# Altium PCB modFOC_ESC.PcbDoc
Units mil, origin at the board's own origin, x right, y up, seen from the top; angles counter-clockwise.
Board outline 6000 x 4000 mil, 2 copper layers (Top Layer, Bottom Layer); 101 components, 80 nets, 411 pads, 0 vias.
Unrouted connection lines stored in the file: 297.
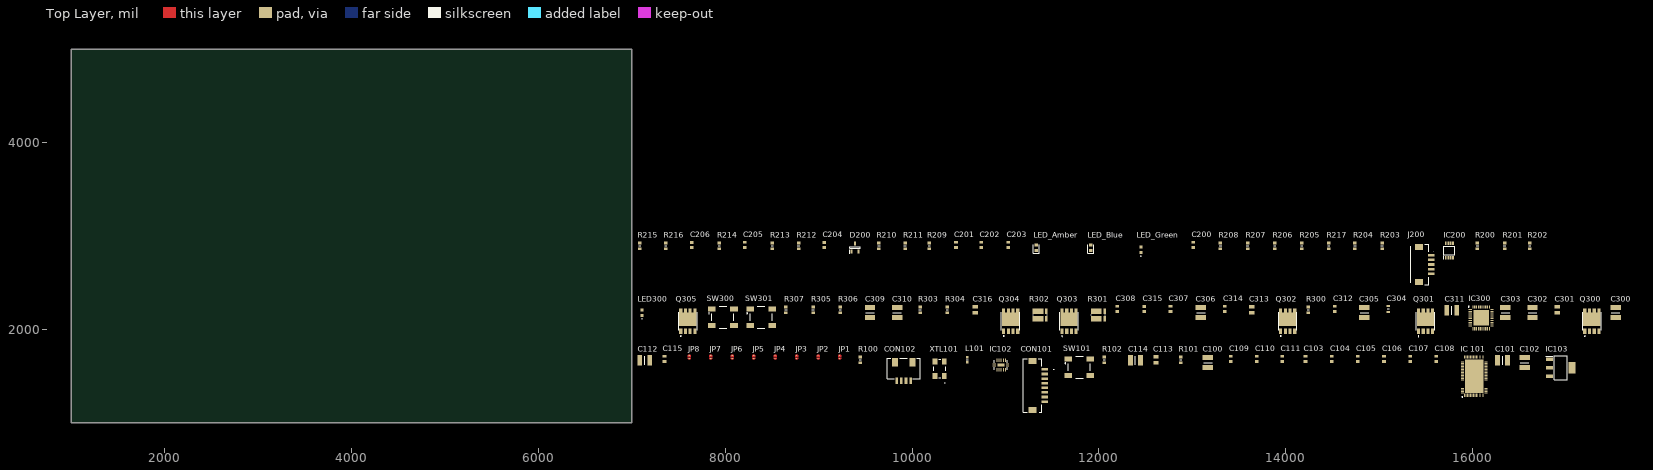
[diagram p0: Top Layer view]
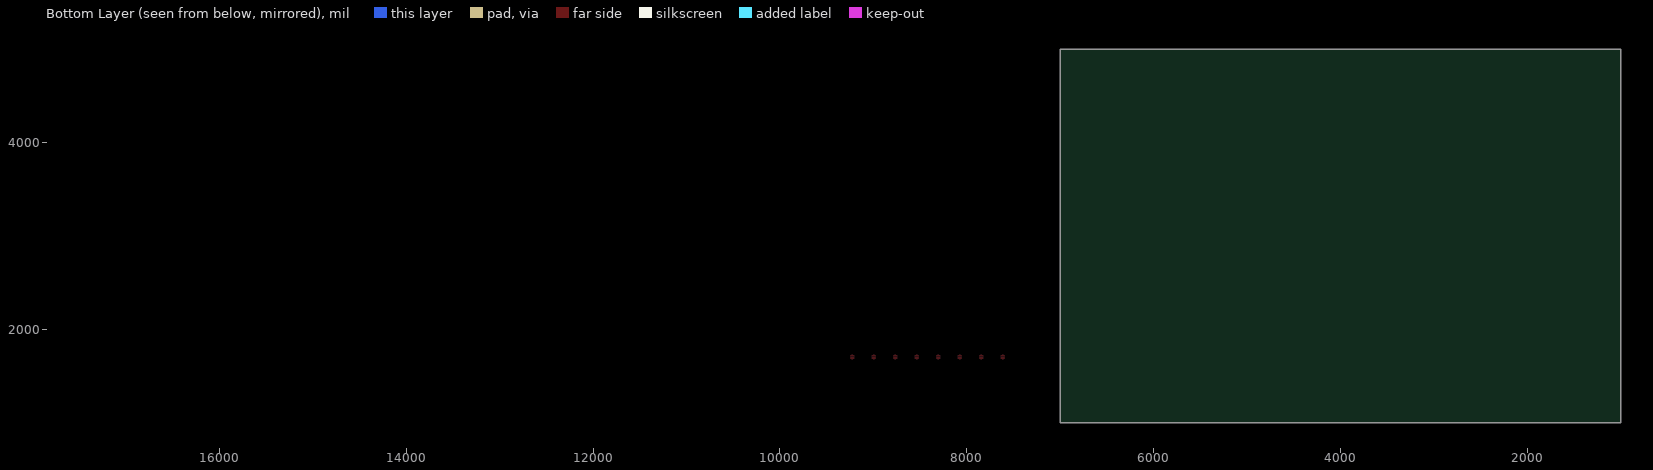
[diagram p1: Bottom Layer view, seen from below]

## Layer stack, top to bottom
Top Solder: solder mask 0.4, Solder Resist, Dk 3.5
Top Layer: signal copper 1.4
Dielectric 1: dielectric 12.6, FR-4, Dk 4.8
Bottom Layer: signal copper 1.4
Bottom Solder: solder mask 0.4, Solder Resist, Dk 3.5

## Board outline
1000,1000 7000,1000 7000,5000 1000,5000

## Design rules (kind name [scope] priority, off if disabled: settings)
Clearance [All] p1: gap=10 ignorepadtopadclearanceinfootprint=FALSE except(0: Arc-Hole Track-Hole SMDPad-Hole THPad-Hole Via-Hole Fill-Hole Poly-Hole Region-Hole Text-Hole)
PolygonConnect [All] p1: connectstyle=Relief reliefconductorwidth=10 reliefentries=4 polygonreliefangle="90 Angle" airgapwidth=10
RoomDefinition modFOC-Sensing [InComponentClass('modFOC-Sensing')] p1: confinementstyle=ConfineIn formatcopy=TRUE lockcomponents=FALSE outline 7045,2430 16825,2430 16825,3060 7045,3060
RoomDefinition modFOC-Powerstage [InComponentClass('modFOC-Powerstage')] p2: confinementstyle=ConfineIn formatcopy=TRUE lockcomponents=FALSE outline 7045,1890 17715,1890 17715,2375 7045,2375
RoomDefinition modFOC-Motion_Controller [InComponentClass('modFOC-Motion_Controller')] p3: confinementstyle=ConfineIn formatcopy=TRUE lockcomponents=FALSE outline 7045,1060 17115,1060 17115,1840 7045,1840
RoutingVias [All] p1: holewidth=28 width=50 viastyle="Through Hole" minholewidth=28 minwidth=50 maxholewidth=28 maxwidth=50
SolderMaskExpansion [All] p1: expansion=4 istentingtop=FALSE
Width [All] p1: maxlimit=10 minlimit=10 preferedwidth=10
30 further rules are at their usual default settings.

## Classes and differential pairs
component class modFOC-Powerstage: C300 C301 C302 C303 C304 C305 C306 C307 C308 C309 C310 C311 C312 C313 C314 C315 C316 IC300 IC? LED300 Q300 Q301 Q302 Q303 Q304 Q305 R300 R301 R302 R303 R304 R305 R306 R307 RADJ1 RT1 SW300 SW301
component class modFOC-Sensing: C200 C201 C202 C203 C204 C205 C206 D200 IC200 J200 LED_Amber LED_Blue LED_Green R200 R201 R202 R203 R204 R205 R206 R207 R208 R209 R210 R211 R212 R213 R214 R215 R216 R217
component class modFOC-Motion_Controller: C100 C101 C102 C103 C104 C105 C106 C107 C108 C109 C110 C111 C112 C113 C114 C115 CON101 CON102 IC102 IC103 "IC 101" JP1 JP2 JP3 JP4 JP5 JP6 JP7 JP8 L101 R100 R101 R102 SW101 XTL101

## Components (designator, comment, footprint, x,y, rotation, side; value= is the part's Value field where it differs from the comment)
C100 "10uF" CAPC3225X280N 13165,1645 r90 top
C101 "10uF" CAPC3225X280N 16320,1670 r0 top
C102 "10uF" CAPC3225X280N 16555,1645 r90 top
C103 "100nF/63V" CAPC1608X97N 14210,1685 r90 top
C104 "100nF/63V" CAPC1608X97N 14490,1685 r90 top
C105 "100nF/63V" CAPC1608X97N 14770,1685 r90 top
C106 "100nF/63V" CAPC1608X97N 15050,1685 r90 top
C107 "100nF/63V" CAPC1608X97N 15330,1685 r90 top
C108 "100nF/63V" CAPC1608X97N 15610,1685 r90 top
C109 "100nF/63V" CAPC1608X97N 13410,1685 r90 top
C110 "100nF/63V" CAPC1608X97N 13690,1685 r90 top
C111 "100nF/63V" CAPC1608X97N 13960,1685 r90 top
C112 "10uF" CAPC3225X280N 7140,1670 r0 top
C113 "470nF/100V" CAPC2012X140N 12610,1675 r90 top
C114 "10uF" CAPC3225X280N 12390,1670 r0 top
C115 "100nF/63V" CAPC1608X97N 7350,1685 r90 top
C200 "100nF" CAPC1608X97N 13010,2905 r90 top
C201 "1n/25V" CAPC1608X97N 10470,2905 r90 top
C202 "1n/25V" CAPC1608X97N 10740,2905 r90 top
C203 "1n/25V" CAPC1608X97N 11030,2905 r90 top
C204 "100pF/63V" CAPC1608X87N 9060,2905 r90 top
C205 "100nF/63V" CAPC1608X97N 8210,2905 r90 top
C206 "100pF/63V" CAPC1608X87N 7640,2905 r90 top
C300 "10uF" CAPC3225X280N 17530,2180 r90 top
C301 "470nF/100V" CAPC2012X140N 16905,2210 r90 top
C302 "10uF/63V" CAPC3225X280N 16640,2180 r90 top
C303 "10uF/63V" CAPC3225X280N 16350,2180 r90 top
C304 "47nF/50V" CAPC1608X90N 15095,2220 r90 top
C305 "10uF" CAPC3225X280N 14840,2180 r90 top
C306 "10uF/63V" CAPC3225X280N 13090,2180 r90 top
C307 "100nF/63V" CAPC1608X97N 12765,2220 r90 top
C308 "100nF/63V" CAPC1608X97N 12195,2220 r90 top
C309 "10uF" CAPC3225X280N 9550,2180 r90 top
C310 "10uF" CAPC3225X280N 9840,2180 r90 top
C311 "10uF/63V" CAPC3225X280N 15775,2205 r0 top
C312 "100nF/63V" CAPC1608X97N 14525,2220 r90 top
C313 "470nF/100V" CAPC2012X140N 13635,2210 r90 top
C314 "100nF/63V" CAPC1608X97N 13345,2220 r90 top
C315 "100pF/63V" CAPC1608X87N 12485,2220 r90 top
C316 "470nF/100V" CAPC2012X140N 10675,2210 r90 top
CON101 "DF13A-8P-1.25H_21_" DF13A8P125H21 11290,1400 r90 top
CON102 "DF13A-4P-1.25H_51_" DF13A4P125H51 9910,1570 r0 top
D200 "BAT54S" SOT95P240X110-3N 9390,2875 r90 top
IC102 "74LVC138ABQ,115" 74HCT595BQ115 10950,1620 r0 top
IC103 "AP2114H-3.3TRG1" SOT230P700X180-4N 16940,1590 r0 top
IC200 "74LVC3G17DP,125" SOP65P400X110-8N 15750,2845 r90 top
IC300 "DRV8323HRTAR" QFN50P600X600X80-41N-D 16090,2125 r0 top
"IC 101" "TMC4671-LA IC" QFN40P1050X650X90-77N 16015,1500 r90 top
J200 "DF13A-5P-1.25H_21_" DF13A5P125H21 15445,2695 r90 top
JP1 "SolderJumper" SolderJmp_0.8mm 9225,1705 r90 top
JP2 "SolderJumper" SolderJmp_0.8mm 8995,1705 r90 top
JP3 "SolderJumper" SolderJmp_0.8mm 8765,1705 r90 top
JP4 "SolderJumper" SolderJmp_0.8mm 8535,1705 r90 top
JP5 "SolderJumper" SolderJmp_0.8mm 8305,1705 r90 top
JP6 "SolderJumper" SolderJmp_0.8mm 8075,1705 r90 top
JP7 "SolderJumper" SolderJmp_0.8mm 7845,1705 r90 top
JP8 "SolderJumper" SolderJmp_0.8mm 7615,1705 r90 top
L101 "30Ohm @100MHz" BLM18KG101TH1D 10590,1675 r90 top
LED300 "RED 2,2V/2mA" LSL29KG1J21Z 7110,2180 r90 top
LED_Amber "AMBER 2V/20mA" LEDC1608X55N 11330,2875 r90 top
LED_Blue "BLUE 2,85V/5mA" LEDC1608X40N 11910,2875 r90 top
LED_Green "GREEN 2,4V/20mA" LGQ396PS35 12450,2855 r90 top
Q300 "TPH2R506PL,L1Q" TPHR9003NLL1Q 17275,2070 r0 top
Q301 "TPH2R506PL,L1Q" TPHR9003NLL1Q 15495,2070 r0 top
Q302 "TPH2R506PL,L1Q" TPHR9003NLL1Q 14020,2070 r0 top
Q303 "TPH2R506PL,L1Q" TPHR9003NLL1Q 11680,2070 r0 top
Q304 "TPH2R506PL,L1Q" TPHR9003NLL1Q 11055,2070 r0 top
Q305 "TPH2R506PL,L1Q" TPHR9003NLL1Q 7600,2070 r0 top
R100 "10k" RESC1608X55N 9445,1675 r90 top
R101 "10k" RESC1608X55N 12875,1675 r90 top
R102 "100R" RESC1608X55N 12055,1675 r90 top
R200 "4k7" RESC1608X55N 16050,2895 r90 top
R201 "4k7" RESC1608X55N 16340,2895 r90 top
R202 "4k7" RESC1608X55N 16610,2895 r90 top
R203 "150R" RESC1608X55N 15030,2895 r90 top
R204 "100R" RESC1608X55N 14740,2895 r90 top
R205 "1k5" RESC1608X55N 14170,2895 r90 top
R206 "4k7" RESC1608X55N 13880,2895 r90 top
R207 "4k7" RESC1608X55N 13590,2895 r90 top
R208 "4k7" RESC1608X55N 13300,2895 r90 top
R209 "100R" RESC1608X55N 10185,2895 r90 top
R210 "10k" RESC1608X55N 9645,2895 r90 top
R211 "10k" RESC1608X55N 9925,2895 r90 top
R212 "100k" RESC1608X55N 8785,2895 r90 top
R213 "1k5" RESC1608X55N 8505,2895 r90 top
R214 "100R" RESC1608X55N 7935,2895 r90 top
R215 "10k" RESC1608X55N 7085,2895 r90 top
R216 "10k" RESC1608X55N 7365,2895 r90 top
R217 "1k5" RESC1608X55N 14460,2895 r90 top
R300 "1M" RESC1608X55N 14240,2210 r90 top
R301 "5mR/3W" WSK12161L000FEA 11995,2155 r0 top
R302 "5mR/3W" WSK12161L000FEA 11370,2155 r0 top
R303 "10k" RESC1608X55N 10085,2210 r90 top
R304 "10k" RESC1608X55N 10375,2210 r90 top
R305 "100R" RESC1608X55N 8940,2210 r90 top
R306 "100R" RESC1608X55N 9230,2210 r90 top
R307 "470R" RESC1608X55N 8650,2210 r90 top
SW101 "LL3301AF065QJ" LL3301FF065QJ 11790,1595 r0 top
SW300 "LL3301AF065QJ" LL3301FF065QJ 7975,2130 r0 top
SW301 "LL3301AF065QJ" LL3301FF065QJ 8385,2130 r0 top
XTL101 "25MHz" FOX924B25 10295,1580 r90 top

## Footprints (in the part's own frame and the unit in brackets; to place one, negate y for a bottom-side part, rotate by r counter-clockwise, add the part's x,y. Pads: shape width x height; smd on the part's side, far side on the other; paste and mask are expansions set on the pad)
74HCT595BQ115 [mm]
  rect 0.9x0.24 smd: 1(-1.8,-0.25) 8(1.8,-0.25) 9(1.8,0.25) 16(-1.8,0.25)
  rect 0.24x0.9 smd: 2(-1.25,-1.3) 3(-0.75,-1.3) 4(-0.25,-1.3) 5(0.25,-1.3) 6(0.75,-1.3) 7(1.25,-1.3) 10(1.25,1.3) 11(0.75,1.3) 12(0.25,1.3) 13(-0.25,1.3) 14(-0.75,1.3) 15(-1.25,1.3)
  rect 1.9x0.9 smd: 17(0,0)
  silkscreen extent -1.75,-1.25 1.75,1.25, body extent -1.8,-1.3 1.8,1.3, height 1
BLM18KG101TH1D [mm]
  rect 0.65x0.7 smd: 1(-0.675,0) 2(0.675,0)
  silkscreen extent 0,-0.3 0,0.3, body extent -0.93,-0.4 0.93,0.4, height 0.85
CAPC1608X87N [mm]
  rect 0.8x0.94 smd: 1(-0.67,0) 2(0.67,0)
  body extent -0.8,-0.4 0.8,0.4, height 0.87
CAPC1608X90N [mm]
  rect 0.54x0.94 smd: 1(-0.8,0) 2(0.8,0)
  silkscreen extent 0,-0.3 0,0.3, body extent -0.8,-0.4 0.8,0.4, height 0.9
CAPC1608X97N [mm]
  rect 0.78x0.98 smd: 1(-0.7,0) 2(0.7,0)
  body extent -0.8,-0.4 0.8,0.4, height 0.97
CAPC2012X140N [mm]
  rect 1.02x1.47 smd: 1(-0.81,0) 2(0.81,0)
  body extent -1,-0.63 1,0.63, height 1.4
CAPC3225X280N [mm]
  rect 1.3x2.82 smd: 1(-1.36,0) 2(1.36,0)
  silkscreen extent 0,-1.15 0,1.15, body extent -1.6,-1.25 1.6,1.25, height 2.8
DF13A4P125H51 [mm]
  rect 0.7x1.8 smd: 1(-1.875,-3.075) 2(-0.625,-3.075) 3(0.625,-3.075) 4(1.875,-3.075)
  rect 1.6x2.2 smd: 5(-2.4,2.005) 6(2.4,2.005)
  silkscreen extent -4.5,-2.42 4.5,3.08, body extent -4.5,-3.91 4.5,3.08, height 3.1
DF13A5P125H21 [mm]
  rect 0.7x1.8 smd: 1(2.5,-2.8) 2(1.25,-2.8) 3(0,-2.8) 4(-1.25,-2.8) 5(-2.5,-2.8)
  rect 1.6x2.2 smd: MP1(-4.75,0.5) MP2(4.75,0.5)
  silkscreen extent -5.45,-3.55 5.45,2.8, body extent -5.45,-3.63 5.45,2.8, height 3.85
DF13A8P125H21 [mm]
  rect 0.7x1.8 smd: 1(4.375,-3.3) 2(3.125,-3.3) 3(1.875,-3.3) 4(0.625,-3.3) 5(-0.625,-3.3) 6(-1.875,-3.3) 7(-3.125,-3.3) 8(-4.375,-3.3)
  rect 1.6x2.2 smd: MP1(-6.625,0) MP2(6.625,0)
  silkscreen extent -7.32,-5.8 7.32,2.5, body extent -7.32,-4.13 7.32,2.5, height 3.7
FOX924B25 [mm]
  rect 1.6x1.3 smd: 1(-2,-1.25) 2(2,-1.25) 3(2,1.25) 4(-2,1.25)
  silkscreen extent -3.9,-1.6 2.5,1.6, body extent -2.67,-1.77 2.67,1.77, height 1.6
LEDC1608X40N [mm]
  rect 0.9x0.95 smd: 1(-0.75,0) 2(0.75,0)
  silkscreen extent -1.55,-0.82 0.75,0.82, body extent -0.8,-0.4 0.8,0.4, height 0.5
LEDC1608X55N [mm]
  rect 0.9x0.95 smd: 1(-0.75,0) 2(0.75,0)
  silkscreen extent -1.55,-0.82 0.75,0.82, body extent -0.8,-0.4 0.8,0.4, height 0.5
LGQ396PS35 [mm]
  rect 0.8x0.8 smd: 1(-0.75,0) 2(0.75,0)
  silkscreen extent -1.85,0 -1.75,0.1, body extent -0.8,-0.4 0.8,0.4, height 0.5
LL3301FF065QJ [mm]
  rect 2.1x1.4 smd: 1(-3,2.25) 2(3,2.25) 3(-3,-2.25) 4(3,-2.25)
  silkscreen extent -3.9,-3 3,3, body extent -3.91,-3 3.91,3, height 7.4
LSL29KG1J21Z [mm]
  rect 0.8x0.8 smd: 1(-0.75,0) 2(0.75,0)
  silkscreen extent -1.7,-0.05 -1.6,0.05, body extent -0.65,-0.4 0.65,0.4, height 0.77
QFN40P1050X650X90-77N [mm]
  rect 0.85x0.2 smd: 1(-5.2,2.6) 2(-5.2,2.2) 3(-5.2,1.8) 4(-5.2,1.4) 5(-5.2,1) 6(-5.2,0.6) 7(-5.2,0.2) 8(-5.2,-0.2) 9(-5.2,-0.6) 10(-5.2,-1) 11(-5.2,-1.4) 12(-5.2,-1.8) 13(-5.2,-2.2) 14(-5.2,-2.6) 39(5.2,-2.6) 40(5.2,-2.2) 41(5.2,-1.8) 42(5.2,-1.4) 43(5.2,-1) 44(5.2,-0.6) 45(5.2,-0.2) 46(5.2,0.2) 47(5.2,0.6) 48(5.2,1) 49(5.2,1.4) 50(5.2,1.8) 51(5.2,2.2) 52(5.2,2.6)
  rect 0.2x0.85 smd: 15(-4.6,-3.2) 16(-4.2,-3.2) 17(-3.8,-3.2) 18(-3.4,-3.2) 19(-3,-3.2) 20(-2.6,-3.2) 21(-2.2,-3.2) 22(-1.8,-3.2) 23(-1.4,-3.2) 24(-1,-3.2) 25(-0.6,-3.2) 26(-0.2,-3.2) 27(0.2,-3.2) 28(0.6,-3.2) 29(1,-3.2) 30(1.4,-3.2) 31(1.8,-3.2) 32(2.2,-3.2) 33(2.6,-3.2) 34(3,-3.2) 35(3.4,-3.2) 36(3.8,-3.2) 37(4.2,-3.2) 38(4.6,-3.2) 53(4.6,3.2) 54(4.2,3.2) 55(3.8,3.2) 56(3.4,3.2) 57(3,3.2) 58(2.6,3.2) 59(2.2,3.2) 60(1.8,3.2) 61(1.4,3.2) 62(1,3.2) 63(0.6,3.2) 64(0.2,3.2) 65(-0.2,3.2) 66(-0.6,3.2) 67(-1,3.2) 68(-1.4,3.2) 69(-1.8,3.2) 70(-2.2,3.2) 71(-2.6,3.2) 72(-3,3.2) 73(-3.4,3.2) 74(-3.8,3.2) 75(-4.2,3.2) 76(-4.6,3.2)
  rect 9.1x5.1 smd: 77(0,0)
  silkscreen extent -5.72,3.1 -5.53,3.3, body extent -5.3,-3.3 5.3,3.3, height 0.9
QFN50P600X600X80-41N-D [mm]
  rect 0.9x0.3 smd: 1(-2.95,2.25) 2(-2.95,1.75) 3(-2.95,1.25) 4(-2.95,0.75) 5(-2.95,0.25) 6(-2.95,-0.25) 7(-2.95,-0.75) 8(-2.95,-1.25) 9(-2.95,-1.75) 10(-2.95,-2.25) 21(2.95,-2.25) 22(2.95,-1.75) 23(2.95,-1.25) 24(2.95,-0.75) 25(2.95,-0.25) 26(2.95,0.25) 27(2.95,0.75) 28(2.95,1.25) 29(2.95,1.75) 30(2.95,2.25)
  rect 0.3x0.9 smd: 11(-2.25,-2.95) 12(-1.75,-2.95) 13(-1.25,-2.95) 14(-0.75,-2.95) 15(-0.25,-2.95) 16(0.25,-2.95) 17(0.75,-2.95) 18(1.25,-2.95) 19(1.75,-2.95) 20(2.25,-2.95) 31(2.25,2.95) 32(1.75,2.95) 33(1.25,2.95) 34(0.75,2.95) 35(0.25,2.95) 36(-0.25,2.95) 37(-0.75,2.95) 38(-1.25,2.95) 39(-1.75,2.95) 40(-2.25,2.95)
  rect 4.25x4.25 smd: 41(0,0)
  silkscreen extent -3.52,2.88 -3.27,3.12, body extent -3.05,-3.05 3.05,3.05, height 0.8
RESC1608X55N [mm]
  rect 0.8x0.95 smd: 1(-0.8,0) 2(0.8,0)
  silkscreen extent 0,-0.3 0,0.3, body extent -0.8,-0.4 0.8,0.4, height 0.55
SolderJmp_0.8mm [mm]
  round 0.3 smd paste+0 mask+0: 1(-0.4,0) 2(0.4,0)
  Top Layer region: -0.15,-0.4 -0.324,-0.36 -0.463,-0.249 -0.54,-0.089 -0.54,0.089 -0.463,0.249 -0.324,0.36 -0.15,0.4 -0.15,0.4
  Top Layer region: 0.15,0.4 0.324,0.36 0.463,0.249 0.54,0.089 0.54,-0.089 0.463,-0.249 0.324,-0.36 0.15,-0.4 0.15,-0.4
  Top Layer lines w0.1: -0.15,0.4 ccw(c-0.15,0) -0.15,-0.4 -0.15,0.4 ; 0.15,0.4 cw(c0.15,0) 0.15,-0.4 0.15,0.4
SOP65P400X110-8N [mm]
  rect 0.95x0.45 smd: 1(-1.975,0.975) 2(-1.975,0.325) 3(-1.975,-0.325) 4(-1.975,-0.975) 5(1.975,-0.975) 6(1.975,-0.325) 7(1.975,0.325) 8(1.975,0.975)
  silkscreen extent -2.45,-1.5 1.15,1.55, body extent -2,-1.5 2,1.5, height 1.1
SOT95P240X110-3N [mm]
  rect 1.1x0.6 smd: 1(-1.1,0.95) 2(-1.1,-0.95) 3(1.1,0)
  silkscreen extent -1.65,-1.45 0.2,1.5, body extent -1.2,-1.45 1.2,1.45, height 1.1
SOT230P700X180-4N [mm]
  rect 1.9x0.9 smd: 1(-3.05,2.3) 2(-3.05,0) 3(-3.05,-2.3)
  rect 1.9x3.2 smd: 4(3.05,0)
  silkscreen extent -4,-3.25 1.75,3.25, body extent -3.5,-3.25 3.5,3.25, height 1.8
TPHR9003NLL1Q [mm]
  rect 0.85x1.45 smd: 1(-1.925,-2.309) 2(-0.635,-2.309) 3(0.635,-2.309) 4(1.925,-2.309)
  rect 0.85x1.05 smd: 5(1.925,3.391) 6(0.635,3.391) 7(-0.635,3.391) 8(-1.925,3.391)
  rect 4.7x3.75 smd: 9(0,0.981)
  silkscreen extent -2.5,-3.7 2.5,2.94, body extent -2.5,-2.95 2.5,3.83, height 1.1
WSK12161L000FEA [mm]
  rect 2.95x1.495 smd: 1(-0.6,-1.053) 4(-0.6,1.053)
  rect 0.7x1.495 smd: 2(1.725,-1.053) 3(1.725,1.053)
  silkscreen extent -1.91,-0.1 1.9,0.1, body extent -2.06,-1.75 1.95,1.75, height 1.51

## Part data
C100 C101 C102 C112 C114 C300 C302 C303 C305 C306 C309 C310 C311: library part CL32B106KMVNNWE, "Capacitor", Manufacturer_Name="Samsung Electro-Mechanics", Mouser Part Number=187-CL32B106KMVNNWE, Arrow Part Number=CL32B106KMVNNWE, Arrow Price/Stock=https://www.arrow.com/en/products/cl32b106kmvnnwe/samsung-electro-mechanics, Datasheet Link=https://www.arrow.com/en/products/cl32b106kmvnnwe/samsung-electro-mechanics, Height=2.8mm, Manufacturer_Part_Number=CL32B106KMVNNWE, Mouser Price/Stock=https://www.mouser.co.uk/ProductDetail/Samsung-Electro-Mechanics/CL32B106KMVNNWE?qs=xZ%2FP%252Ba9zWqaEMBbSgKy8gQ%3D%3D
C103 C104 C105 C106 C107 C108 C109 C110 C111 C115 C205 C307 C308 C312 C314: library part C0805C104MMREC7210, "Capacitor", Manufacturer_Name=Vishay, Manufacturer_Part_Number=VJ0603Y104JXJAC, Mouser Part Number=77-VJ0603Y104JXJAC, Datasheet Link=http://www.vishay.com/docs/45226/vj31xrohsautomlcc.pdf, Height=1mm, Mouser Price/Stock=https://www.mouser.com/Search/Refine.aspx?Keyword=77-VJ0603Y104JXJAC
C113 C301 C313 C316: library part 08051C474KAT2A, "Capacitor", Manufacturer_Name=AVX, Mouser Part Number=581-08051C474KAT2A, Datasheet Link=http://datasheets.avx.com/X7RDielectric.pdf, Height=1.4mm, Manufacturer_Part_Number=08051C474KAT2A, Mouser Price/Stock=https://www.mouser.co.uk/ProductDetail/AVX/08051C474KAT2A?qs=%2FjdEcI0p95Mz%2FN5KbrGN6Q%3D%3D
C200: library part VJ0603Y104JXJAC, "Capacitor", Manufacturer_Name=Vishay, Mouser Part Number=77-VJ0603Y104JXJAC, Datasheet Link=http://www.vishay.com/docs/45226/vj31xrohsautomlcc.pdf, Height=0.97mm, Manufacturer_Part_Number=VJ0603Y104JXJAC, Mouser Price/Stock=https://www.mouser.com/Search/Refine.aspx?Keyword=77-VJ0603Y104JXJAC
C201 C202 C203: library part GRM033R71E102KA01D, "Capacitor", Manufacturer_Name="Murata Electronics", Mouser Part Number=81-GRM033R71E102KA1D, Arrow Part Number=GRM033R71E102KA01D, Arrow Price/Stock=https://www.arrow.com/en/products/grm033r71e102ka01d/murata-manufacturing, Datasheet Link=https://psearch.en.murata.com/capacitor/product/GRM033R71E102KA01%23.html, Height=0.33mm, Manufacturer_Part_Number=GRM033R71E102KA01D, Mouser Price/Stock=https://www.mouser.co.uk/ProductDetail/Murata-Electronics/GRM033R71E102KA01D/?qs=%252BwCMEOx2S5vqymn%2Fc34U1A%3D%3D
C204 C206 C315: library part C0603C101K1HACTU, "Capacitor", Manufacturer_Name=Kemet, Mouser Part Number=80-C0603C101K1HACTU, Datasheet Link=https://www.mouser.com/datasheet/2/212/KEM_C1007_X8R_ULTRA_150C_SMD-1102703.pdf, Height=0.87mm, Manufacturer_Part_Number=C0603C101K1HACTU, Mouser Price/Stock=https://www.mouser.co.uk/ProductDetail/KEMET/C0603C101K1HACTU?qs=W0yvOO0ixfE5G01qpfeqIQ%3D%3D
C304: library part CGA3E2X7R1H473K080AA, "Capacitor", Manufacturer_Name=TDK, Mouser Part Number=810-CGA3E2X7R1H473K, Arrow Part Number=CGA3E2X7R1H473K080AA, Arrow Price/Stock=https://www.arrow.com/en/products/cga3e2x7r1h473k080aa/tdk, Datasheet Link=http://docs-emea.rs-online.com/webdocs/14e9/0900766b814e9125.pdf, Height=0.9mm, Manufacturer_Part_Number=CGA3E2X7R1H473K080AA, Mouser Price/Stock=https://www.mouser.co.uk/ProductDetail/TDK/CGA3E2X7R1H473K080AA?qs=NRhsANhppD%252BXNlr9LoLgTw%3D%3D
CON101: "Connector", Manufacturer_Name=Hirose, Manufacturer_Part_Number=DF13A-8P-1.25H(21), Mouser Part Number=798-DF13A8P125H21, Datasheet Link=http://uk.rs-online.com/web/p/products/7793617P, Height=3.6mm, Mouser Price/Stock=https://www.mouser.co.uk/ProductDetail/Hirose-Connector/DF13A-8P-125H21?qs=XQjbzJWzFPViW0MGk5%2FVbA%3D%3D
CON102: "Connector", Manufacturer_Name=Hirose, Manufacturer_Part_Number=DF13A-4P-1.25H(51), Mouser Part Number=798-DF13A4P125H51, Datasheet Link=https://www.hirose.com/product/en/products/DF13/DF13A-4P-1.25H%2851%29/, Height=3mm, Mouser Price/Stock=https://www.mouser.co.uk/ProductDetail/Hirose-Connector/DF13A-4P-125H51?qs=XQjbzJWzFPVR%252B%2FH2vthd9w%3D%3D
D200: "Schottky Diode", Manufacturer_Name=Rectron, Mouser Part Number=583-BAT54S, Arrow Part Number=BAT54S, Arrow Price/Stock=https://www.arrow.com/en/products/bat54s/rectron, Datasheet Link=https://www.rectron.com/data_sheets/bat54s.pdf, Height=1.1mm, Manufacturer_Part_Number=BAT54S, Mouser Price/Stock=https://www.mouser.co.uk/ProductDetail/Rectron/BAT54S?qs=7pEAo90IqNGRiqD7TkybWA%3D%3D
IC102: "Integrated Circuit", Manufacturer_Name=Nexperia, Mouser Part Number=771-LVC138ABQ115, Arrow Part Number=74LVC138ABQ,115, Arrow Price/Stock=https://www.arrow.com/en/products/74lvc138abq115/nexperia, Datasheet Link=https://assets.nexperia.com/documents/data-sheet/74LVC138A.pdf, Manufacturer_Part_Number=74LVC138ABQ,115, Mouser Price/Stock=https://www.mouser.co.uk/ProductDetail/Nexperia/74LVC138ABQ115?qs=me8TqzrmIYUqHGpwzmLq4w%3D%3D
IC103: "Integrated Circuit", Manufacturer_Name="Diodes Inc.", Mouser Part Number=621-AP2114H-3.3TRG1, Arrow Part Number=AP2114H-3.3TRG1, Arrow Price/Stock=https://www.arrow.com/en/products/ap2114h-3.3trg1/diodes-incorporated, Datasheet Link=http://uk.rs-online.com/web/p/products/8283528, Height=1.8mm, Manufacturer_Part_Number=AP2114H-3.3TRG1, Mouser Price/Stock=https://www.mouser.co.uk/ProductDetail/Diodes-Incorporated/AP2114H-33TRG1?qs=x6A8l6qLYDDSG%2FfwzcsOhw%3D%3D
IC200: "Integrated Circuit", Manufacturer_Name=Nexperia, Mouser Part Number=771-LVC3G17DP125, Arrow Part Number=74LVC3G17DP,125, Arrow Price/Stock=https://www.arrow.com/en/products/74lvc3g17dp125/nexperia, Datasheet Link=https://assets.nexperia.com/documents/data-sheet/74LVC3G17.pdf, Height=1.1mm, Manufacturer_Part_Number=74LVC3G17DP,125, Mouser Price/Stock=https://www.mouser.co.uk/ProductDetail/Nexperia/74LVC3G17DP125?qs=me8TqzrmIYUUngWcw0uHGA%3D%3D
IC300: "Integrated Circuit", Manufacturer_Name="Texas Instruments", Mouser Part Number=595-DRV8323HRTAR, Arrow Part Number=DRV8323HRTAR, Arrow Price/Stock=https://www.arrow.com/en/products/drv8323hrtar/texas-instruments, Datasheet Link=http://www.ti.com/lit/gpn/drv8323, Height=0.8mm, Manufacturer_Part_Number=DRV8323HRTAR, Mouser Price/Stock=https://www.mouser.co.uk/ProductDetail/Texas-Instruments/DRV8323HRTAR?qs=u4fy%2FsgLU9N%252BsI8bz2iwaQ%3D%3D
"IC 101": "Integrated Circuit"
J200: "Connector", Manufacturer_Name=Hirose, Manufacturer_Part_Number=DF13A-5P-1.25H(21), Mouser Part Number=798-DF13A5P125H21, Datasheet Link=https://componentsearchengine.com/Datasheets/1/DF13A-5P-1.25H(21).pdf, Height=3.75mm, Mouser Price/Stock=https://www.mouser.co.uk/ProductDetail/Hirose-Connector/DF13A-5P-125H21?qs=XQjbzJWzFPWvJsE2o%252B4Q8Q%3D%3D
L101: library part BLM18KG300TH1D, "Ferrite Bead", Manufacturer_Name="Murata Electronics", Mouser Part Number=81-BLM18KG300TH1D, Arrow Part Number=BLM18KG300TH1D, Arrow Price/Stock=https://www.arrow.com/en/products/blm18kg300th1d/murata-manufacturing, Datasheet Link=https://www.murata.com/en-us/products/productdetail?partno=BLM18KG300TH1%23, Height=0.75mm, Manufacturer_Part_Number=BLM18KG300TH1D, Mouser Price/Stock=https://www.mouser.com/Search/Refine.aspx?Keyword=81-BLM18KG300TH1D
LED300: library part LS_L29K-G1J2-1-Z, "LED", Manufacturer_Name=OSRAM, Manufacturer_Part_Number="LS L29K-G1J2-1-Z", Mouser Part Number=720-LSL29K-G1J2-1-Z, Datasheet Link=https://dammedia.osram.info/media/resource/hires/osram-dam-5662679/LS%20L29K_EN.pdf, Height=0.67mm, Mouser Price/Stock=https://www.mouser.co.uk/ProductDetail/OSRAM-Opto-Semiconductors/LS-L29K-G1J2-1-Z?qs=nTDll3UaDK6mUW9LNPY0Mw%3D%3D
LED_Amber: library part ASMT-RA45-AP932, "LED", Manufacturer_Name="Avago Technologies", Mouser Part Number=630-ASMT-RA45-AP932, Datasheet Link=https://docs.broadcom.com/docs/AV02-0378EN, Height=0.55mm, Manufacturer_Part_Number=ASMT-RA45-AP932, Mouser Price/Stock=https://www.mouser.co.uk/ProductDetail/Broadcom-Avago/ASMT-RA45-AP932?qs=7zQgkplsu%2FO5gZneoB42ug%3D%3D
LED_Blue: library part LB_Q39G-L2OO-35-1, "LED", Arrow Part Number="LB Q39G-L2OO-35-1", Manufacturer_Name=OSRAM, Mouser Part Number=720-LBQ39GL2N2351, Arrow Price/Stock=https://www.arrow.com/en/products/lbq39g-l2oo-35-1/osram-opto-semiconductors, Datasheet Link="http://www.mouser.com/ds/2/311/LB Q39G - CHIPLED 0603-553388.pdf", Height=0.4mm, Manufacturer_Part_Number="LB Q39G-L2OO-35-1", Mouser Price/Stock=https://www.mouser.co.uk/ProductDetail/OSRAM-Opto-Semiconductors/LB-Q39G-L2OO-35-1?qs=74fRo9GAWsxvZBH6a5xY%252BA%3D%3D
LED_Green: library part LG_Q396-PS-35, "LED", Arrow Part Number="LG Q396-PS-35", Manufacturer_Name=OSRAM, Mouser Part Number=720-LGQ396A3964, Arrow Price/Stock=https://www.arrow.com/en/products/lgq396-ps-35/osram-opto-semiconductors, Datasheet Link=https://mouser.componentsearchengine.com/Datasheets/2/LG%20Q396-PS-35.pdf, Height=0.4mm, Manufacturer_Part_Number="LG Q396-PS-35", Mouser Price/Stock=https://www.mouser.co.uk/ProductDetail/OSRAM-Opto-Semiconductors/LG-Q396-PS-35?qs=xC%252BE9h5iuX5%252BCocujXxOpw%3D%3D
Q300 Q301 Q302 Q303 Q304 Q305: "MOSFET (N-Channel)", Manufacturer_Name=Toshiba, Mouser Part Number=757-TPH2R506PLL1Q, Arrow Part Number=TPH2R506PL,L1Q, Arrow Price/Stock=https://www.arrow.com/en/products/tph2r506pll1q/toshiba, Datasheet Link=http://toshiba.semicon-storage.com/info/docget.jsp?did=55522&prodName=TPH2R506PL, Height=1mm, Manufacturer_Part_Number=TPH2R506PL,L1Q, Mouser Price/Stock=https://www.mouser.co.uk/ProductDetail/Toshiba/TPH2R506PLL1Q?qs=bUPhaerQQeFGJjj6SxbPEQ%3D%3D
R100 R101 R210 R211 R215 R216 R303 R304: library part RC0603FR-0710KL, "Resistor", Manufacturer_Name="YAGEO (PHYCOMP)", Mouser Part Number=603-RC0603FR-0710KL, Arrow Part Number=RC0603FR-0710KL, Arrow Price/Stock=https://www.arrow.com/en/products/rc0603fr-0710kl/yageo, Datasheet Link=http://www.yageo.com/documents/recent/PYu-RC0603_51_RoHS_L_v5.pdf, Height=0.55mm, Manufacturer_Part_Number=RC0603FR-0710KL, Mouser Price/Stock=https://www.mouser.co.uk/ProductDetail/Yageo/RC0603FR-0710KL?qs=grNVn54RoB%252B3GtjbJj3wJQ%3D%3D
R102 R204 R209 R214 R305 R306: library part CRCW0603100RFKEAC, "Resistor", Manufacturer_Name=Vishay, Mouser Part Number=71-CRCW0603100RFKEAC, Arrow Part Number=CRCW0603100RFKEAC, Arrow Price/Stock=https://www.arrow.com/en/products/crcw0603100rfkeac/vishay, Datasheet Link=https://componentsearchengine.com/Datasheets/1/CRCW0603100RFKEAC.pdf, Height=0.55mm, Manufacturer_Part_Number=CRCW0603100RFKEAC, Mouser Price/Stock=https://www.mouser.co.uk/ProductDetail/Vishay-Dale/CRCW0603100RFKEAC/?qs=E3Y5ESvWgWPJqb4%2F19sAKw%3D%3D
R200 R201 R202 R206 R207 R208: library part CRCW06034K70JNEAC, "Resistor", Manufacturer_Name=Vishay, Mouser Part Number=71-CRCW06034K70JNEAC, Arrow Part Number=CRCW06034K70JNEAC, Arrow Price/Stock=https://www.arrow.com/en/products/crcw06034k70jneac/vishay, Datasheet Link=http://www.vishay.com/docs/28773/crcwce3.pdf, Height=0.55mm, Manufacturer_Part_Number=CRCW06034K70JNEAC, Mouser Price/Stock=https://www.mouser.co.uk/ProductDetail/Vishay-Dale/CRCW06034K70JNEAC/?qs=E3Y5ESvWgWMzBuUf0K3dnA%3D%3D
R203: library part SFR03EZPF1500, "Resistor", Manufacturer_Name="ROHM Semiconductor", Mouser Part Number=755-SFR03EZPF1500, Datasheet Link=https://componentsearchengine.com/Datasheets/1/SFR03EZPF1500.pdf, Height=0.55mm, Manufacturer_Part_Number=SFR03EZPF1500, Mouser Price/Stock=https://www.mouser.com/Search/Refine.aspx?Keyword=755-SFR03EZPF1500
R205 R213 R217: library part ERJ1GNF1501C, "Resistor", Manufacturer_Name=Panasonic, Datasheet Link=https://industrial.panasonic.com/cdbs/www-data/pdf/RDA0000/AOA0000C84.pdf, Height=0.26mm, Manufacturer_Part_Number=ERJ1GNF1501C
R212: library part ERJ1GNF1003C, "Resistor", Manufacturer_Name=Panasonic, Arrow Part Number=ERJ1GNF1003C, Arrow Price/Stock=https://www.arrow.com/en/products/erj1gnf1003c/panasonic, Datasheet Link=https://industrial.panasonic.com/cdbs/www-data/pdf/RDA0000/AOA0000C84.pdf, Height=0.26mm, Manufacturer_Part_Number=ERJ1GNF1003C
R300: library part RC0603FR-071ML, "Resistor", Manufacturer_Name="YAGEO (PHYCOMP)", Mouser Part Number=603-RC0603FR-071ML, Arrow Part Number=RC0603FR-071ML, Arrow Price/Stock=https://www.arrow.com/en/products/rc0603fr-071ml/yageo, Datasheet Link=https://www.yageo.com/upload/media/product/productsearch/datasheet/rchip/PYu-RC_Group_51_RoHS_L_11.pdf, Height=0.55mm, Manufacturer_Part_Number=RC0603FR-071ML, Mouser Price/Stock=https://www.mouser.co.uk/ProductDetail/Yageo/RC0603FR-071ML/?qs=VU8sRB4EgwDPceeQKB324w%3D%3D
R301 R302: library part WSK1216L5000FEA, "Resistor", Manufacturer_Name=Vishay, Datasheet Link=http://www.vishay.com/docs/30189/wsk1216.pdf, Height=1.9mm, Manufacturer_Part_Number=WSK1216L5000FEA
R307: library part RC0603FR-10470RL, "Resistor", Manufacturer_Name="YAGEO (PHYCOMP)", Mouser Part Number=603-RC0603FR-10470RL, Datasheet Link=http://www.yageo.com/documents/recent/PYu-RC0603_51_RoHS_L_v5.pdf, Height=0.55mm, Manufacturer_Part_Number=RC0603FR-10470RL, Mouser Price/Stock=https://www.mouser.co.uk/ProductDetail/Yageo/RC0603FR-10470RL?qs=EiqXWrxQq62gi8HBTlzDog%3D%3D
SW101 SW300 SW301: "Switch", Manufacturer_Name=E-Switch, Mouser Part Number=612-LL3301AF065QJ, Datasheet Link=https://media.digikey.com/pdf/Data%20Sheets/E-Switch%20PDFs/LL3301AF065QJ.pdf, Height=7.3mm, Manufacturer_Part_Number=LL3301AF065QJ, Mouser Price/Stock=https://www.mouser.co.uk/ProductDetail/E-Switch/LL3301AF065QJ?qs=QtyuwXswaQi68RkbBY57jQ%3D%3D
XTL101: library part FOX924B-25, "25Mhz Oscillator"

## Nets (pads, with @x,y where several pads share a name; then routed paths per layer and width w, separated by ;. In a path a pad name is that pad's centre, name@x,y a point inside that pad or via, vN(x,y) a via of type N, cw(c..) or ccw(c..) an arc to the next point about the centre after c; other vN are vias at no path point)
3V3: "IC 101.2" "IC 101.13" "IC 101.43" "IC 101.52" "IC 101.55" "IC 101.61" "IC 101.72" C100.1 C102.1 C103.2 C104.2 C105.2 C106.2 C107.2 C108.2 C113.2 CON102.1 IC102.6 IC102.16 IC103.2 IC103.4 L101.1 R100.2 R101.2 R204.2 R304.2
+5: "IC 101.23" C101.1 C112.1 C308.2 CON101.1 D200.2 IC103.3 IC300.24 J200.5 R200.1 R201.1 R202.1 R205.2 R210.2 R211.2 R217.2
GND: "IC 101.3" "IC 101.14" "IC 101.24" "IC 101.44" "IC 101.53" "IC 101.54" "IC 101.62" "IC 101.73" "IC 101.77" C100.2 C101.2 C102.2 C103.1 C104.1 C105.1 C106.1 C107.1 C108.1 C109.1 C110.1 C111.1 C112.2 C113.1 C114.2 C115.1 C200.2 C201.2 C202.2 C203.2 C204.1 C205.1 C206.1 C300.1 C301.1 C302.1 C303.1 C306.1 C307.1 C308.1 C309.2 C310.2 C311.1 C312.2 C313.1 C314.2 C315.2 C316.1 CON101.8 CON101.MP1 CON101.MP2 CON102.4 CON102.5 CON102.6 D200.1 IC102.4 IC102.5 IC102.8 IC102.17 IC103.1 IC200.4 IC300.19 IC300.20 IC300.26 IC300.32 IC300.40 IC300.41 J200.1 J200.MP1 J200.MP2 LED_Amber.1 LED_Blue.1 LED_Green.1 Q305.1 Q305.2 Q305.3 R213.1 R215.1 R216.1 R300.2 R301.1 R302.1 SW101.2 SW101.4 SW300.2 SW300.4 SW301.2 SW301.4 XTL101.2
HALL_U_5V: C201.1 IC200.3 R208.2
HALL_U_IN: J200.2 R200.2 R208.1
HALL_V_5V: C202.1 IC200.6 R207.2
HALL_V_IN: J200.3 R201.2 R207.1
HALL_W_5V: C203.1 IC200.1 R206.2
HALL_W_IN: J200.4 R202.2 R206.1
NetC109_2: "IC 101.15" "IC 101.45" "IC 101.63" C109.2 C110.2 C111.2
NetC114_1: C114.1 R102.2
NetC115_2: C115.2 L101.2 XTL101.4
NetC200_1: C200.1 IC200.8
NetC204_2: "IC 101.16" C204.2 R209.1
NetC205_2: "IC 101.20" "IC 101.74" C205.2 D200.3 R212.1 R213.2
NetC206_2: "IC 101.18" C206.2 R214.1
NetC300_2: C300.2 IC300.27 IC300.29 IC300.33 R307.2
NetC304_1: C304.1 IC300.2
NetC304_2: C304.2 IC300.1
NetC305_2: C305.2 IC300.3
NetC309_1: C309.1 R305.2
NetC310_1: C310.1 R306.2
NetCON101_2: CON101.2 IC102.1
NetCON101_3: CON101.3 IC102.2
NetCON101_4: CON101.4 IC102.3
NetCON101_5: "IC 101.9" CON101.5
NetCON101_6: "IC 101.8" CON101.6
NetCON101_7: "IC 101.7" CON101.7
NetCON102_2: "IC 101.10" CON102.2
NetCON102_3: "IC 101.11" CON102.3
NetIC102_7: IC102.7 JP8.2
NetIC102_9: IC102.9 JP7.2
NetIC102_10: IC102.10 JP6.2
NetIC102_11: IC102.11 JP5.2
NetIC102_12: IC102.12 JP4.2
NetIC102_13: IC102.13 JP3.2
NetIC102_14: IC102.14 JP2.2
NetIC102_15: IC102.15 JP1.2
NetIC200_2: "IC 101.38" IC200.2
NetIC200_5: "IC 101.37" IC200.5
NetIC200_7: "IC 101.36" IC200.7
NetIC300_6: IC300.6 Q300.4
NetIC300_7: IC300.7 Q300.1 Q300.2 Q300.3 Q301.5 Q301.6 Q301.7 Q301.8 Q301.9
NetIC300_8: IC300.8 Q301.4
NetIC300_9: IC300.9 R301.3
NetIC300_10: IC300.10 R301.2
NetIC300_11: IC300.11 R302.2
NetIC300_12: IC300.12 R302.3
NetIC300_13: IC300.13 Q303.4
NetIC300_14: IC300.14 Q302.1 Q302.2 Q302.3 Q303.5 Q303.6 Q303.7 Q303.8 Q303.9
NetIC300_15: IC300.15 Q302.4
NetIC300_16: IC300.16 Q304.4
NetIC300_17: IC300.17 Q304.1 Q304.2 Q304.3 Q305.5 Q305.6 Q305.7 Q305.8 Q305.9
NetIC300_18: IC300.18 Q305.4
NetIC300_22: IC300.22 R214.2
NetIC300_23: IC300.23 R209.2
NetIC300_25: IC300.25 LED300.1
NetIC300_28: IC300.28 R300.1
NetIC300_30: IC300.30 R303.1 R305.1 SW300.1 SW300.3
NetIC300_31: IC300.31 R304.1 R306.1 SW301.1 SW301.3
NetIC300_34: "IC 101.46" IC300.34
NetIC300_35: "IC 101.47" IC300.35
NetIC300_36: "IC 101.41" IC300.36
NetIC300_37: "IC 101.42" IC300.37
NetIC300_38: "IC 101.39" IC300.38
NetIC300_39: "IC 101.40" IC300.39
"NetIC 101_6": "IC 101.6" JP1.1 JP2.1 JP3.1 JP4.1 JP5.1 JP6.1 JP7.1 JP8.1 R100.1
"NetIC 101_12": "IC 101.12" R203.2
"NetIC 101_17": "IC 101.17" R210.1 R215.2
"NetIC 101_19": "IC 101.19" R211.1 R216.2
"NetIC 101_32": "IC 101.32" R303.2
"NetIC 101_50": "IC 101.50" R101.1 R102.1 SW101.1 SW101.3
"NetIC 101_51": "IC 101.51" XTL101.3
NetLED300_2: LED300.2 R307.1
NetLED_Amber_2: LED_Amber.2 R205.1 R217.1
NetLED_Blue_2: LED_Blue.2 R204.1
NetLED_Green_2: LED_Green.2 R203.1
NetQ301_1: Q301.1 Q301.2 Q301.3 R301.4
NetQ303_1: Q303.1 Q303.2 Q303.3 R302.4
VB+: C301.2 C302.2 C303.2 C305.1 C306.2 C307.2 C311.2 C312.1 C313.2 C314.1 C315.1 C316.2 IC300.4 IC300.5 Q300.5 Q300.6 Q300.7 Q300.8 Q300.9 Q302.5 Q302.6 Q302.7 Q302.8 Q302.9 Q304.5 Q304.6 Q304.7 Q304.8 Q304.9 R212.2
pads on no net: "IC 101.1" "IC 101.4" "IC 101.5" "IC 101.21" "IC 101.22" "IC 101.25" "IC 101.26" "IC 101.27" "IC 101.28" "IC 101.29" "IC 101.30" "IC 101.31" "IC 101.33" "IC 101.34" "IC 101.35" "IC 101.48" "IC 101.49" "IC 101.56" "IC 101.57" "IC 101.58" "IC 101.59" "IC 101.60" "IC 101.64" "IC 101.65" "IC 101.66" "IC 101.67" "IC 101.68" "IC 101.69" "IC 101.70" "IC 101.71" "IC 101.75" "IC 101.76" IC300.21 XTL101.1